# EAGLE board SparkFun_TMC6300_Breakout (EAGLE 9.6.2)
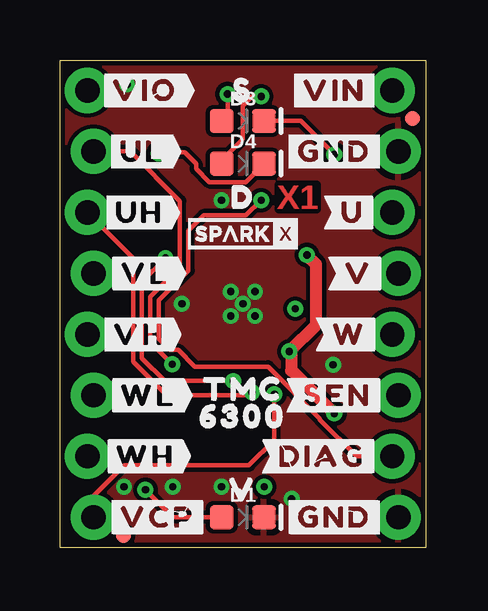
[diagram p0: board, top side]
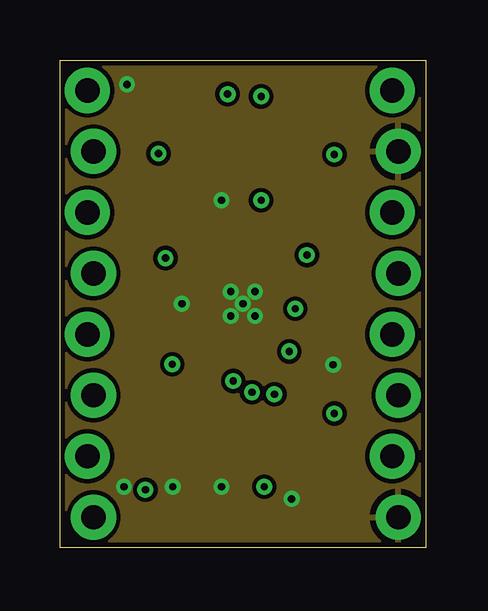
[diagram p1: board, inner layer Route2]
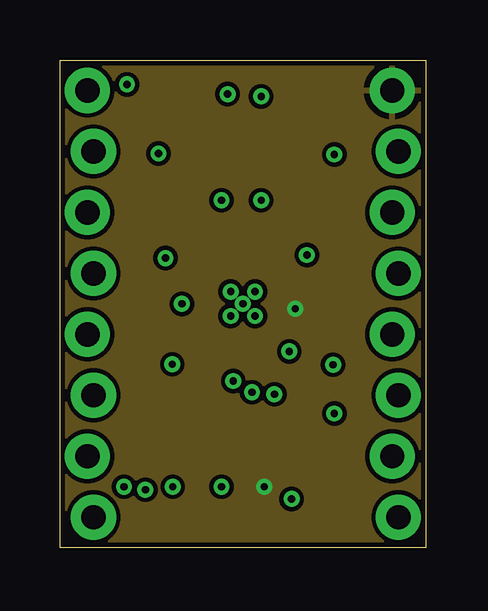
[diagram p2: board, inner layer Route15]
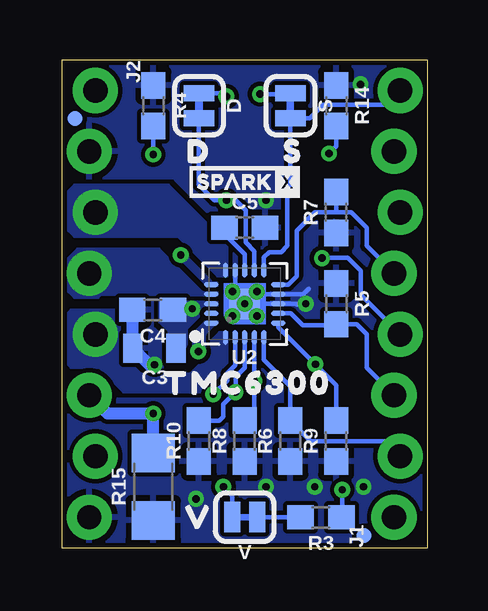
[diagram p3: board, bottom side, seen from below]

Size 15.24 x 20.32 mm. Coordinates in mm from the lower left corner, seen from the top.
Outline: 0,20.32 15.24,20.32 15.24,0 0,0 0,20.32
Copper layers (1+2*15+16): Top 0.035559375mm / dielectric 0.47751875mm / Route2 0.035559375mm / dielectric 0.47751875mm / Route15 0.035559375mm / dielectric 0.47751875mm / Bottom 0.035559375mm
Design rules "SparkFun-4-Layer-General-JLCPCB": minimum track width 7mil, minimum drill 12mil, track to track 7mil, track to pad 7mil, pad to pad 7mil, via to via 7mil, smd to smd 7mil, copper to edge 7mil, drill to drill 7mil, minimum pad ring 7mil, minimum via ring 7mil, stop-mask expansion 3mil, vias tented up to drill 25mil, thermal gap 10mil

## Footprints (pad centres in the part's own frame; a part is rotated, then mirrored left to right if it is on the bottom)
0805 = smd 0.8 x 1.2: 1 -0.9,0; 2 0.9,0
0603 = smd 1.1 x 1: 1 -0.85,0; 2 0.85,0
SMT-JUMPER_2_NC_TRACE_SILK = smd 0.66 x 1.27: 1 -0.521,0; 2 0.521,0
LED-0603 = smd 1 x 1: A -0.877,0; C 0.877,0
FIDUCIAL-MICRO = smd 0.635 x 0.635: 1 0,0
1X08_LOCK_NO_SILK = drill 1.016 pad 1.88: 1 0,0.127; 2 2.54,-0.127; 3 5.08,0.127; 4 7.62,-0.127; 5 10.16,0.127; 6 12.7,-0.127; 7 15.24,0.127; 8 17.78,-0.127
1206 = smd 1.6 x 1.8: 1 -1.4,0; 2 1.4,0
QFN-20 = smd 0.6 x 0.2: 1 -1.4,0.8; 2 -1.4,0.4; 3 -1.4,0; 4 -1.4,-0.4; 5 -1.4,-0.8; 11 1.4,-0.8; 12 1.4,-0.4; 13 1.4,0; 14 1.4,0.4; 15 1.4,0.8 | smd 0.2 x 0.6: 6 -0.8,-1.4; 7 -0.4,-1.4; 8 0,-1.4; 9 0.4,-1.4; 10 0.8,-1.4; 16 0.8,1.4; 17 0.4,1.4; 18 0,1.4; 19 -0.4,1.4; 20 -0.8,1.4 | smd 1.27 x 1.27: PAD 0,0

## Placement (x,y rotation side)
C3  10uF  [0805]  11.38,8.31 180 bottom
C4  0.1uF  [0603]  11.46,9.91 180 bottom
C5  0.1uF  [0603]  7.62,13.34 0 bottom
D  JUMPER-SMT_2_NC_TRACE_SILK  [SMT-JUMPER_2_NC_TRACE_SILK]  9.53,18.41 270 bottom
D1  RED  [LED-0603]  7.62,1.27 0 top
D3  BLUE  [LED-0603]  7.62,17.78 0 top
D4  GREEN  [LED-0603]  7.62,16 0 top
FD1  FIDUCIALUFIDUCIAL  [FIDUCIAL-MICRO]  14.68,17.88 180 bottom
FD2  FIDUCIALUFIDUCIAL  [FIDUCIAL-MICRO]  2.64,0.51 180 bottom
FD3  FIDUCIALUFIDUCIAL  [FIDUCIAL-MICRO]  2.64,0.51 180 top
FD4  FIDUCIALUFIDUCIAL  [FIDUCIAL-MICRO]  14.68,17.88 180 top
FRAME1  FRAME-LETTER  [CREATIVE_COMMONS]  26.67,-11.43 0 bottom  (outside the outline)
J1  [1X08_LOCK_NO_SILK]  1.27,1.27 90 bottom
J2  [1X08_LOCK_NO_SILK]  13.97,19.05 270 bottom
LOGO1  OSHW-LOGONO_SILK  [DUMMY]  12.7,-2.54 0 top
LOGO2  SPECIAL_INSTRUCTIONS-ORDERING  [ORDERING_INSTRUCTIONS]  -3.81,50.8 0 bottom  (outside the outline)
R3  1k  [0603]  4.45,1.27 180 bottom
R4  330  [0603]  11.43,18.41 270 bottom
R5  100k  [0603]  3.81,10.16 270 bottom
R6  100k  [0603]  5.71,4.45 90 bottom
R7  100k  [0603]  3.81,13.97 90 bottom
R8  100k  [0603]  7.62,4.45 90 bottom
R9  100k  [0603]  3.81,4.45 90 bottom
R10  100k  [0603]  9.53,4.45 90 bottom
R14  330  [0603]  3.81,18.41 270 bottom
R15  0.12  [1206]  11.43,2.54 90 bottom
S  JUMPER-SMT_2_NC_TRACE_SILK  [SMT-JUMPER_2_NC_TRACE_SILK]  5.71,18.41 270 bottom
U2  TMC6300  [QFN-20]  7.62,10.16 90 bottom
U$1  [#GND#1]  11.43,16.51 0 top
U$2  [#SEN#0]  11.56,6.35 0 top
U$3  [#DIAG#0]  10.92,3.81 0 top
U$9  [#U#6]  12.19,13.97 0 top
U$12  [#VCP#0]  4.06,1.27 0 top
U$13  [#VIO#1]  3.56,19.05 0 top
U$15  [63001]  7.62,5.46 0 top
U$16  [D0]  9.53,16.51 0 bottom
U$17  [TMC63000]  7.49,6.86 0 bottom
U$18  [D0]  7.62,14.61 0 top
U$19  [S1]  7.62,19.05 0 top
U$20  [V2]  7.62,2.41 0 top
U$21  [#UH#5]  3.3,13.97 0 top
U$22  [#UL#4]  3.43,16.51 0 top
U$23  [TMC0]  7.62,6.6 0 top
U$24  [#VIN#0]  11.43,19.05 0 top
U$25  [#V#7]  12.45,11.43 0 top
U$26  [V2]  9.53,1.27 0 bottom
U$27  [S1]  5.59,16.51 0 bottom
U$28  [#GND#1]  11.43,1.27 0 top
U$30  [#VH#2]  3.3,8.89 0 top
U$31  [#VL#3]  3.56,11.43 0 top
U$32  [#W#8]  12.06,8.89 0 top
U$33  [#WH#1]  3.56,3.81 0 top
U$34  [#WL#0]  3.68,6.35 0 top
U$36  SPARKX-LOGO2  [SPARKX-TINY]  7.62,15.24 0 bottom
U$37  SPARKX-LOGO2  [SPARKX-TINY]  7.62,13.08 0 top
V  JUMPER-SMT_2_NC_TRACE_SILK  [SMT-JUMPER_2_NC_TRACE_SILK]  7.62,1.27 180 bottom

## Library data of the parts
C3 = SparkFun-Capacitors; PROD_ID: CAP-14259
C4 C5 = SparkFun-Capacitors; PROD_ID: CAP-16503
D S V = SparkFun-Jumpers
D1 = SparkFun-LED; PROD_ID: DIO-00819
D3 = SparkFun-LED; PROD_ID: DIO-08575
D4 = SparkFun-LED; PROD_ID: DIO-00821
FD1-FD4 LOGO1 LOGO2 = SparkFun-Aesthetics
FRAME1 = SparkFun-Aesthetics; DESIGNER: Ricardo Ramos
J1 J2 = SparkFun-Connectors
R3 = SparkFun-Resistors; PROD_ID: RES-07856
R4 R14 = SparkFun-Resistors; PROD_ID: RES-00818
R5-R10 = SparkFun-Resistors; PROD_ID: RES-07828
R15 = SparkFun-Resistors; PROD_ID: RES-17192
U2 = TMC6300; PROD_ID: IC-17193
U$1-U$3 U$9 U$12 U$13 U$15-U$28 U$30-U$34 = output
U$36 U$37 = SparkX

## Nets
DIAG: D.2 J2.7 U2.12
GND: C3.2 C4.2 C5.2 D1.C J2.2 J2.8 R4.1 R5.1 R6.1 R7.1 R8.1 R9.1 R10.1 R14.1 R15.1 U2.8 U2.9 U2.14 U2.PAD
N$1: R3.2 V.1
N$4: D1.A R3.1
N$5: D3.A S.1
N$6: C5.1 U2.13
N$9: D4.A D.1
N$10: D3.C R4.2
N$12: D4.C R14.2
SENSE: J2.6 R15.2 U2.16 U2.20
U: J2.3 U2.15
UH: J1.6 R10.2 U2.3
UL: J1.7 R9.2 U2.6
V: J2.4 U2.17
VCP: J1.1 U2.2
VH: J1.4 R8.2 U2.4
VIN: C3.1 C4.1 J2.1 U2.18 V.2
VIO/!STDBY!: J1.8 S.2 U2.11
VL: J1.5 R7.2 U2.10
W: J2.5 U2.1
WH: J1.2 R6.2 U2.5
WL: J1.3 R5.2 U2.7

## Tracks (layer width: path | path; a pad name or v marks a point on that pad's centre or on a via)
DIAG  (via drill 0.3)
  Top 0.178: v8.38,14.48 7.75,13.84 5.98,13.84 5.35,13.21 5.35,11.54 4.12,10.31 4.12,8.71 4.58,8.24 4.92,8.24 5.62,7.54 8.67,7.54 10.83,5.38 10.83,5.34 12.36,3.81 J2.7
  Bottom 0.178: D.2 9.53,15.11 8.89,14.48 v8.38,14.48 8,14.48 7.59,14.06 7.59,12.72 7.22,12.36 U2.12
GND  (via drill 0.3)
  Bottom 0.191: U2.14 8.02,10.78 v8.13,10.67 | v7.11,10.67 7,10.56 U2.9 5.19,10.56 4.95,10.79 | U2.PAD U2.8 5.46,10.16 5.42,10.12 5.33,10.12
  Bottom 0.508: C4.2 12.3,8.51 | v11.38,7.62 11.59,7.62 C3.2
  other vias: 8.13,9.65 7.11,9.65 7.62,10.16 9.65,2.03 4.7,2.54 2.67,2.54 6.73,2.54 6.73,14.48 2.79,19.3 5.08,10.16
  pour Top (isolate 0.127, rank 5): 0,0 15.24,0 15.24,20.32 0,20.32
  pour Route2 (isolate 0.127): 15.24,0 0,0 0,20.32 15.24,20.32
  pour Bottom (isolate 0.127, rank 5): 15.24,0 0,0 0,20.32 15.24,20.32
N$1
  Bottom 0.178: R3.2 V.1
N$4  (via drill 0.3)
  Top 0.178: D1.A 4.7,1.27 v3.56,2.41
  Bottom 0.178: v3.56,2.41 3.56,1.31 R3.1
N$5  (via drill 0.3)
  Top 0.178: D3.A 6.99,18.02 v6.99,18.9
  Bottom 0.178: v6.99,18.9 5.75,18.9 S.1
N$6
  Bottom 0.178: U2.13 7.62,12.23 8.47,13.08 C5.1
N$9  (via drill 0.3)
  Top 0.178: D4.A 6.74,16.15 7.62,17.03 7.62,18.42 8,18.8 v8.38,18.8
  Bottom 0.178: v8.38,18.8 8.51,18.94 D.1
N$10  (via drill 0.3)
  Top 0.178: D3.C 10.03,17.78 v11.43,16.38
  Bottom 0.178: R4.2 v11.43,16.38
N$12  (via drill 0.3)
  Top 0.178: v4.11,16.42 4.15,16.47 5.2,16.47 5.68,15.99 5.68,15.78 6.22,15.23 7.73,15.23 D4.C
  Bottom 0.178: R14.2 3.81,16.72 v4.11,16.42
SENSE  (via drill 0.3)
  Top 0.508: v10.29,12.19 10.67,11.81 10.67,9.3 v9.55,8.18 9.63,8.1 9.63,7.39 v11.43,5.59
  Bottom 0.508: R15.2 v11.43,5.59 13.34,5.59 J2.6
  pour Bottom (isolate 0.127, rank 3, no thermals): 8.76,10.92 9.53,10.92 10.73,12.13 10.29,12.57 8.76,11.05
  pour Bottom (isolate 0.127, rank 3, no thermals): 8.74,9.42 9.5,9.42 9.91,9.02 9.91,8.26 9.27,8.26 9.27,8.89
U
  pour Bottom (isolate 0.127, rank 2, no thermals): 8.76,11.3 10.41,12.95 14.73,12.95 15.11,13.34 15.11,14.73 14.73,15.11 10.79,15.11 8.36,12.67 8.36,11.3
UH  (via drill 0.3)
  Top 0.178: v8,6.48 7.87,6.35 4.45,6.35 3.05,7.75 3.05,12.06 J1.6
  Bottom 0.178: U2.3 7.62,7.49 8,7.11 v8,6.48 8.51,5.97 8.51,5.46 8.68,5.29 R10.2
UL  (via drill 0.3)
  Top 0.178: v4.68,7.64 3.76,8.56 3.76,10.46 4.99,11.69 4.99,14.44 2.92,16.51 J1.7
  Bottom 0.178: U2.6 6.22,9.19 v4.68,7.64 3.81,6.78 R9.2
V
  pour Bottom (isolate 0.127, no thermals): 8.76,10.52 9.91,10.52 9.93,10.54 13.59,10.54 13.72,10.41 14.73,10.41 15.11,10.79 15.11,11.94 14.61,12.45 11.18,12.45 9.4,10.67 8.76,10.67
VCP  (via drill 0.3)
  Top 0.178: J1.1 1.4,2.16 2.67,3.43 7.87,3.43 8.93,4.49 v8.93,6.39
  Bottom 0.178: v8.93,6.39 8.36,6.97 8.36,7.26 8.02,7.6 U2.2
VH  (via drill 0.3)
  Top 0.178: v4.4,12.06 3.4,11.07 3.4,7.9 4.36,6.95 v7.22,6.95
  Bottom 0.178: U2.4 v7.22,6.95 7.22,5.73 7.62,5.33 R8.2 | v4.4,12.06 4.38,12.08 3.33,12.08 2.79,11.55 2.79,10.54 J1.4
VIN  (via drill 0.3)
  Bottom 0.178: V.2 8.14,2.17 v8.51,2.54
  other vias: 9.8,9.96
  pour Bottom (isolate 0.127, rank 2, no thermals): 11.18,10.54 10.16,10.54 9.91,10.29 8.76,10.29 8.76,10.03 9.09,10.03 10.03,9.09 10.03,8.38 10.79,8.38 10.79,9.02 11.18,9.4
  pour Route15 (isolate 0.127): 15.24,0 0,0 0,20.32 15.24,20.32
VIO/!STDBY!
  Bottom 0.178: U2.11 6.82,12.1 6.6,12.32 6.1,12.32 5.84,12.57 5.84,14.99 5.71,15.11 S.2 4.91,17.89 4.35,18.45 1.66,18.45 1.14,18.97 J1.8
VL
  Bottom 0.178: 3.81,13.97 4.7,13.97 5.46,13.21 5.46,11.3 5.8,10.96 U2.10 | R7.2 3.81,13.97 | 3.81,13.97 3.17,13.97 2.54,13.34 2.54,12.57 J1.5
W
  pour Bottom (isolate 0.127, no thermals): 8.33,8.97 8.33,7.52 9.37,6.48 12.67,6.48 13.69,7.49 14.86,7.49 15.11,7.75 15.11,9.65 14.86,9.91 12.95,9.91 12.83,9.78 12.83,8.13 11.94,7.24 9.91,7.24 9.02,8.13 9.02,8.64 8.69,8.97
WH
  Bottom 0.178: U2.5 6.82,7.84 5.71,6.73 R6.2 4.87,4.45 1.78,4.45 J1.2
WL
  Bottom 0.178: U2.7 5.7,9.76 5.21,9.27 3.85,9.27 R5.2 2.96,9.31 2.54,8.89 2.54,7.49 J1.3

## Text on the board
Top: X1
Measures: Dimensions in inches
bDocu: Board thickness is 1.6mm | 4 Layer Board | N. Seidle